# EAGLE board MIB-BAT (EAGLE 7.6.0)
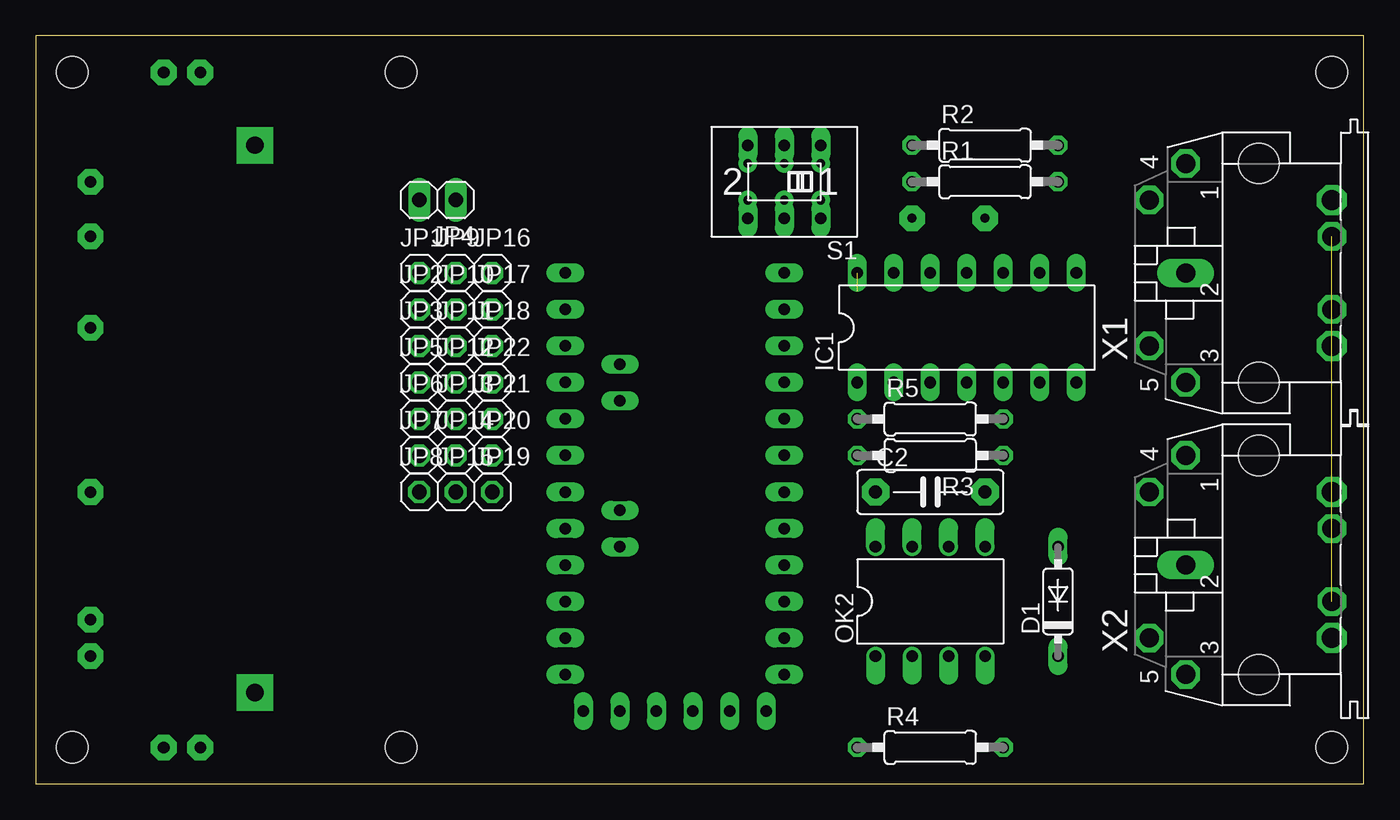
[diagram p0: board, top side]
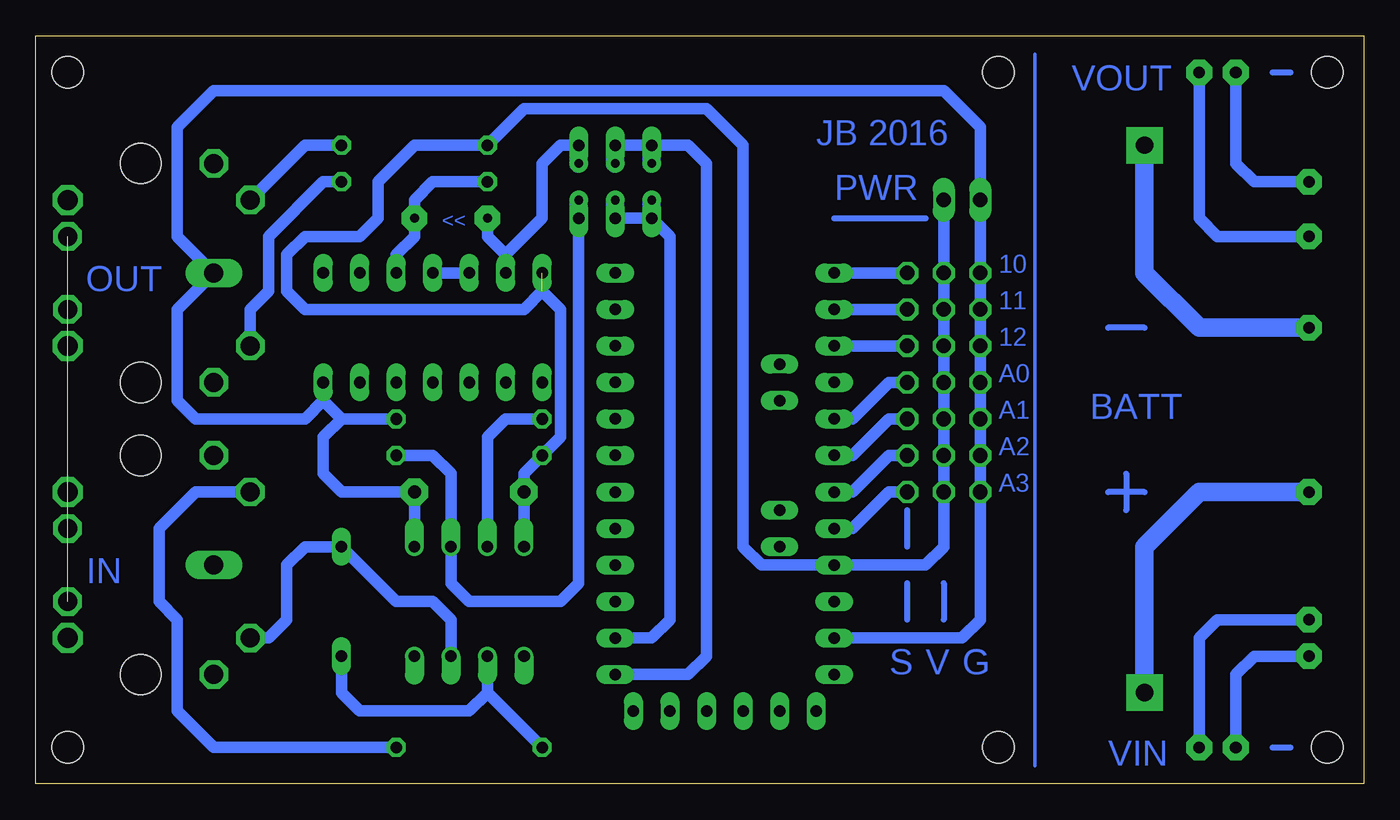
[diagram p1: board, bottom side, seen from below]

Size 92.38 x 52.06 mm. Coordinates in mm from the lower left corner, seen from the top.
Outline: 0,0 92.38,0 92.38,52.06 0,52.06 0,0
Copper layers (1*16): Top 0.035mm / dielectric 1.5mm / Bottom 0.035mm
Design rules "default": minimum track width 10mil, minimum drill 24mil, track to track 8mil, track to pad 8mil, pad to pad 8mil, via to via 8mil, smd to smd 8mil, copper to edge 40mil, drill to drill 8mil, minimum pad ring 10mil, minimum via ring 8mil, stop-mask expansion 4mil, vias tented up to drill 0mil, thermal gap 10mil
Holes 2.2 mm at 2.54,2.54 2.54,49.53 90.17,49.53 90.17,2.54 25.4,2.54 25.4,49.53

## Footprints (pad centres in the part's own frame; a part is rotated, then mirrored left to right if it is on the bottom)
C7.5B3 = drill 0.914 pad 1.905 octagon: 1 -3.81,0; 2 3.81,0
DO35-7 = drill 0.813 long: A 3.81,0; C -3.81,0
DIL14 = drill 0.813 long: 1 -7.62,-3.81; 2 -5.08,-3.81; 3 -2.54,-3.81; 4 0,-3.81; 5 2.54,-3.81; 6 5.08,-3.81; 7 7.62,-3.81; 8 7.62,3.81; 9 5.08,3.81; 10 2.54,3.81; 11 0,3.81; 12 -2.54,3.81; 13 -5.08,3.81; 14 -7.62,3.81
1X01 = drill 1.016 octagon: 1 0,0
1X02 = drill 1.016 long: 1 -1.27,0; 2 1.27,0
DIL08 = drill 0.813 offset: 1 -3.81,-3.81; 2 -1.27,-3.81; 3 1.27,-3.81; 4 3.81,-3.81; 5 3.81,3.81; 6 1.27,3.81; 7 -1.27,3.81; 8 -3.81,3.81
0207/10 = drill 0.813 octagon: 1 -5.08,0; 2 5.08,0
A68-A31 = drill 0.813 long: 1 -2.54,-2.54; 2 0,-2.54; 3 2.54,-2.54; 4 -2.54,2.54; 5 0,2.54; 6 2.54,2.54
PRO-MINI-2 = drill 0.8 long: A0 6.35,2.54; A1 6.35,0; A2 6.35,-2.54; A3 6.35,-5.08; A4 2.54,1.27; A5 2.54,3.81; A6 2.54,-8.89; A7 2.54,-6.35; D2 -8.89,2.54; D3 -8.89,0; D4 -8.89,-2.54; D5 -8.89,-5.08; D6 -8.89,-7.62; D7 -8.89,-10.16; D8 -8.89,-12.7; D9 -8.89,-15.24; D10 6.35,-15.24; D11 6.35,-12.7; D12 6.35,-10.16; D13 6.35,-7.62; DTR 5.08,15.24; GND 6.35,10.16; GND1 -8.89,5.08; GND2 -7.62,15.24; GND3 -5.08,15.24; RAW 6.35,12.7; RST 6.35,7.62; RST1 -8.89,7.62; RX1 -8.89,10.16; RX1-1 0,15.24; TX0 -8.89,12.7; TX0-1 2.54,15.24; VCC 6.35,5.08; VCC1 -2.54,15.24
MAB5SH = drill 1.321 octagon: 1 7.62,5.08; 3 -7.62,5.08; 4 5.08,7.62; 5 -5.08,7.62; PE -2.54,-5.08; PE@ 2.54,-5.08 | drill 1.321 long: 2 0,5.08 | hole 2.794: 7.62,0; -7.62,0

## Placement (x,y rotation side)
C2  [C7.5B3]  62.23,20.32 0 top
D1  1N4148DO35-7  [DO35-7]  71.12,12.7 90 top
IC1  74LS14N  [DIL14]  64.77,31.75 0 top
JP1  [1X01]  26.67,35.56 0 top
JP2  [1X01]  26.67,33.02 0 top
JP3  [1X01]  26.67,30.48 0 top
JP4  [1X02]  27.94,40.64 180 top
JP5  [1X01]  26.67,27.94 0 top
JP6  [1X01]  26.67,25.4 0 top
JP7  [1X01]  26.67,22.86 0 top
JP8  [1X01]  26.67,20.32 0 top
JP9  [1X01]  29.21,35.56 0 top
JP10  [1X01]  29.21,33.02 0 top
JP11  [1X01]  29.21,30.48 0 top
JP12  [1X01]  29.21,27.94 0 top
JP13  [1X01]  29.21,25.4 0 top
JP14  [1X01]  29.21,22.86 0 top
JP15  [1X01]  29.21,20.32 0 top
JP16  [1X01]  31.75,35.56 0 top
JP17  [1X01]  31.75,33.02 0 top
JP18  [1X01]  31.75,30.48 0 top
JP19  [1X01]  31.75,20.32 0 top
JP20  [1X01]  31.75,22.86 0 top
JP21  [1X01]  31.75,25.4 0 top
JP22  [1X01]  31.75,27.94 0 top
OK2  6N137  [DIL08]  62.23,12.7 0 top
R1  220  [0207/10]  66.04,41.91 0 top
R2  220  [0207/10]  66.04,44.45 0 top
R3  2K2  [0207/10]  62.23,22.86 180 top
R4  220  [0207/10]  62.23,2.54 0 top
R5  2K2  [0207/10]  62.23,25.4 0 top
S1  [A68-A31]  52.07,41.91 180 top
U$1  PRO-MINI-2  [PRO-MINI-2]  43.18,20.32 180 top
X1  MAB5SH  [MAB5SH]  85.09,35.56 90 top
X2  MAB5SH  [MAB5SH]  85.09,15.24 90 top

## Library data of the parts
C2 = capacitor-wima
D1 = diode
IC1 = 74xx-eu
JP1-JP22 = pinhead
OK2 = optocoupler; MPN: 6N137; OC_FARNELL: 1328376; OC_NEWARK: 52M1895
R1-R5 = rcl
S1 = switch
U$1 = Arduino-clone
X1 X2 = con-hirschmann; OC_FARNELL: 809883; OC_NEWARK: unknown

## Nets
N$1: S1.5 U$1.RX1
N$2: IC1.11 IC1.12
N$3: IC1.10 R1.1
N$4: D1.C OK2.2 R4.1
N$5: R4.2 X2.4
N$6: D1.A OK2.3 X2.5
N$7: R1.2 X1.5
N$8: R2.2 X1.4
N$10: OK2.6 R3.1 S1.4
N$11: C2.2 IC1.7 JP1.1 JP2.1 JP3.1 JP4.2 JP5.1 JP6.1 JP7.1 JP8.1 OK2.5 R5.2 U$1.GND X1.2
N$13: JP16.1 U$1.D10
N$14: JP17.1 U$1.D11
N$15: C2.1 IC1.14 JP4.1 JP9.1 JP10.1 JP11.1 JP12.1 JP13.1 JP14.1 JP15.1 OK2.8 R2.1 R3.2 U$1.VCC
N$16: JP18.1 U$1.D12
N$18: JP19.1 U$1.A0
N$19: JP20.1 U$1.A1
N$23: S1.2 U$1.TX0
N$29: JP21.1 U$1.A2
N$30: JP22.1 U$1.A3
N$41: OK2.7 R5.1
N$42: IC1.13 S1.1
PE: X1.PE X1.PE@ X2.PE X2.PE@

## Tracks (layer width: path | path; a pad name or v marks a point on that pad's centre or on a via)
N$1  (via drill 0.61 pad 1.27)
  Bottom 0.813: U$1.RX1 49.53,10.16 48.26,11.43 48.26,38.1 49.53,39.37 S1.5
  Bottom 1.27: 49.53,39.37 v49.53,40.64 | S1.5 v52.07,40.64
N$2
  Bottom 0.813: IC1.12 IC1.11
N$3
  Bottom 0.813: IC1.10 67.31,36.83 66.04,38.1 66.04,40.64 64.77,41.91 R1.1
N$4
  Bottom 0.813: R4.1 60.96,6.35 | OK2.2 60.96,6.35 | 60.96,6.35 62.23,5.08 69.85,5.08 71.12,6.35 D1.C
N$5
  Bottom 0.813: X2.4 81.28,20.32 83.82,17.78 83.82,12.7 82.55,11.43 82.55,5.08 80.01,2.54 R4.2
N$6
  Bottom 0.813: OK2.3 63.5,11.43 64.77,12.7 67.31,12.7 D1.A 73.66,16.51 74.93,15.24 74.93,11.43 76.2,10.16 X2.5
N$7
  Bottom 0.813: X1.5 77.47,33.02 76.2,34.29 76.2,38.1 72.39,41.91 R1.2
N$8
  Bottom 0.813: X1.4 73.66,44.45 R2.2
N$9
  Bottom 0.406: 15.24,20.32 17.78,20.32
N$10  (via drill 0.61 pad 1.27)
  Bottom 0.813: S1.4 54.61,13.97 55.88,12.7 62.23,12.7 63.5,13.97 OK2.6 63.5,21.59 64.77,22.86 R3.1
  Bottom 1.27: S1.4 v54.61,40.64
N$11
  Bottom 0.813: OK2.5 C2.2 71.12,20.32 72.39,21.59 72.39,24.13 71.12,25.4 | U$1.GND 27.94,10.16 26.67,11.43 JP8.1 JP7.1 JP6.1 JP5.1 JP3.1 JP2.1 JP1.1 JP4.2 26.67,45.72 29.21,48.26 80.01,48.26 82.55,45.72 82.55,38.1 X1.2 82.55,33.02 82.55,26.67 81.28,25.4 73.66,25.4 72.39,26.67 | IC1.7 72.39,26.67 | 72.39,26.67 71.12,25.4 | 71.12,25.4 R5.2
N$12  (via drill 1.4 pad 1.78)
  other vias: 90.17,10.16
N$13
  Bottom 0.813: U$1.D10 JP16.1
N$14
  Bottom 0.813: U$1.D11 JP17.1
N$15  (1 unrouted)
  Bottom 0.813: JP4.1 JP9.1 JP10.1 JP11.1 JP12.1 JP13.1 JP14.1 JP15.1 29.21,16.51 30.48,15.24 U$1.VCC 41.91,15.24 43.18,16.51 43.18,44.45 45.72,46.99 58.42,46.99 R2.1 66.04,44.45 68.58,41.91 68.58,39.37 69.85,38.1 73.66,38.1 74.93,36.83 74.93,34.29 73.66,33.02 58.42,33.02 57.15,34.29 55.88,33.02 55.88,24.13 R3.2 58.42,21.59 C2.1 OK2.8
N$16
  Bottom 0.813: U$1.D12 JP18.1
N$17  (via drill 1.4 pad 1.78)
  other vias: 90.17,20.32
N$18
  Bottom 0.813: U$1.A0 35.56,17.78 33.02,20.32 JP19.1
N$19
  Bottom 0.813: U$1.A1 35.56,20.32 33.02,22.86 JP20.1
N$20  (via drill 1.4 pad 1.78)
  other vias: 90.17,30.48
N$21  (via drill 1.4 pad 1.78)
  other vias: 90.17,40.64
N$23  (via drill 0.61 pad 1.27)
  Bottom 0.813: U$1.TX0 46.99,7.62 45.72,8.89 45.72,43.18 46.99,44.45 49.53,44.45 S1.2
  Bottom 1.27: 49.53,44.45 v49.53,43.18 | S1.2 v52.07,43.18
N$24  (via drill 0.8 pad 1.78, 1.2 pad 2.54)
  Bottom 1.27: v15.24,44.45 15.24,35.56 11.43,31.75 v3.81,31.75
N$25  (via drill 0.8 pad 1.78, 1.2 pad 2.54)
  Bottom 1.27: v15.24,6.35 15.24,16.51 11.43,20.32 v3.81,20.32
N$26  (via drill 0.8 pad 1.78)
  Bottom 0.813: v8.89,49.53 8.89,43.18 7.62,41.91 v3.81,41.91
N$27  (via drill 0.8 pad 1.78)
  Bottom 0.813: v11.43,49.53 11.43,39.37 10.16,38.1 v3.81,38.1
N$28
  Bottom 0.406: 16.51,21.59 16.51,19.05
N$29
  Bottom 0.813: U$1.A2 35.56,22.86 33.02,25.4 JP21.1
N$30
  Bottom 0.813: U$1.A3 35.56,25.4 33.02,27.94 JP22.1
N$31
  Bottom 0.406: 15.24,31.75 17.78,31.75
N$32
  Bottom 0.406: 6.35,49.53 5.08,49.53
N$33  (via drill 0.8 pad 1.78)
  Bottom 0.813: v11.43,2.54 11.43,10.16 10.16,11.43 v3.81,11.43
N$34  (via drill 0.8 pad 1.78)
  Bottom 0.813: v8.89,2.54 8.89,7.62 7.62,8.89 v3.81,8.89
N$35
  Bottom 0.406: 6.35,2.54 5.08,2.54
N$36
  Bottom 0.406: 29.21,13.97 29.21,11.43
N$37
  Bottom 0.406: 31.75,11.43 31.75,13.97
N$38
  Bottom 0.406: 31.75,16.51 31.75,19.05
N$39
  Bottom 0.406: 36.83,39.37 30.48,39.37
N$40
  Bottom 0.254: 22.86,1.27 22.86,50.8
N$41
  Bottom 0.813: OK2.7 60.96,24.13 59.69,25.4 R5.1
N$42  (via drill 0.61 pad 1.27, 0.61 pad 1.78)
  Bottom 0.813: v60.96,39.37 60.96,38.1 59.69,36.83 | S1.1 55.88,44.45 57.15,43.18 57.15,39.37 59.69,36.83 | IC1.13 59.69,36.83
  Bottom 1.27: S1.1 v54.61,43.18
N$43  (via drill 0.61 pad 1.78)
  other vias: 66.04,39.37
PE  (3 unrouted)

## Text on the board
Bottom: VOUT | JB 2016 | PWR | << | 10 | OUT | 11 | 12 | A0 | BATT | A1 | A2 | A3 | IN | G | V | S | VIN